# Altium PCB DOCK_ESP32_v1.0.PcbDoc
Units mil, origin at the board's own origin, x right, y up, seen from the top; angles counter-clockwise.
Board outline 2755.91 x 2755.91 mil, 4 copper layers (Top Layer, GROUND, POWER, Bottom Layer), stack 62.449 mil thick; 84 components, 47 nets, 289 pads, 150 vias.
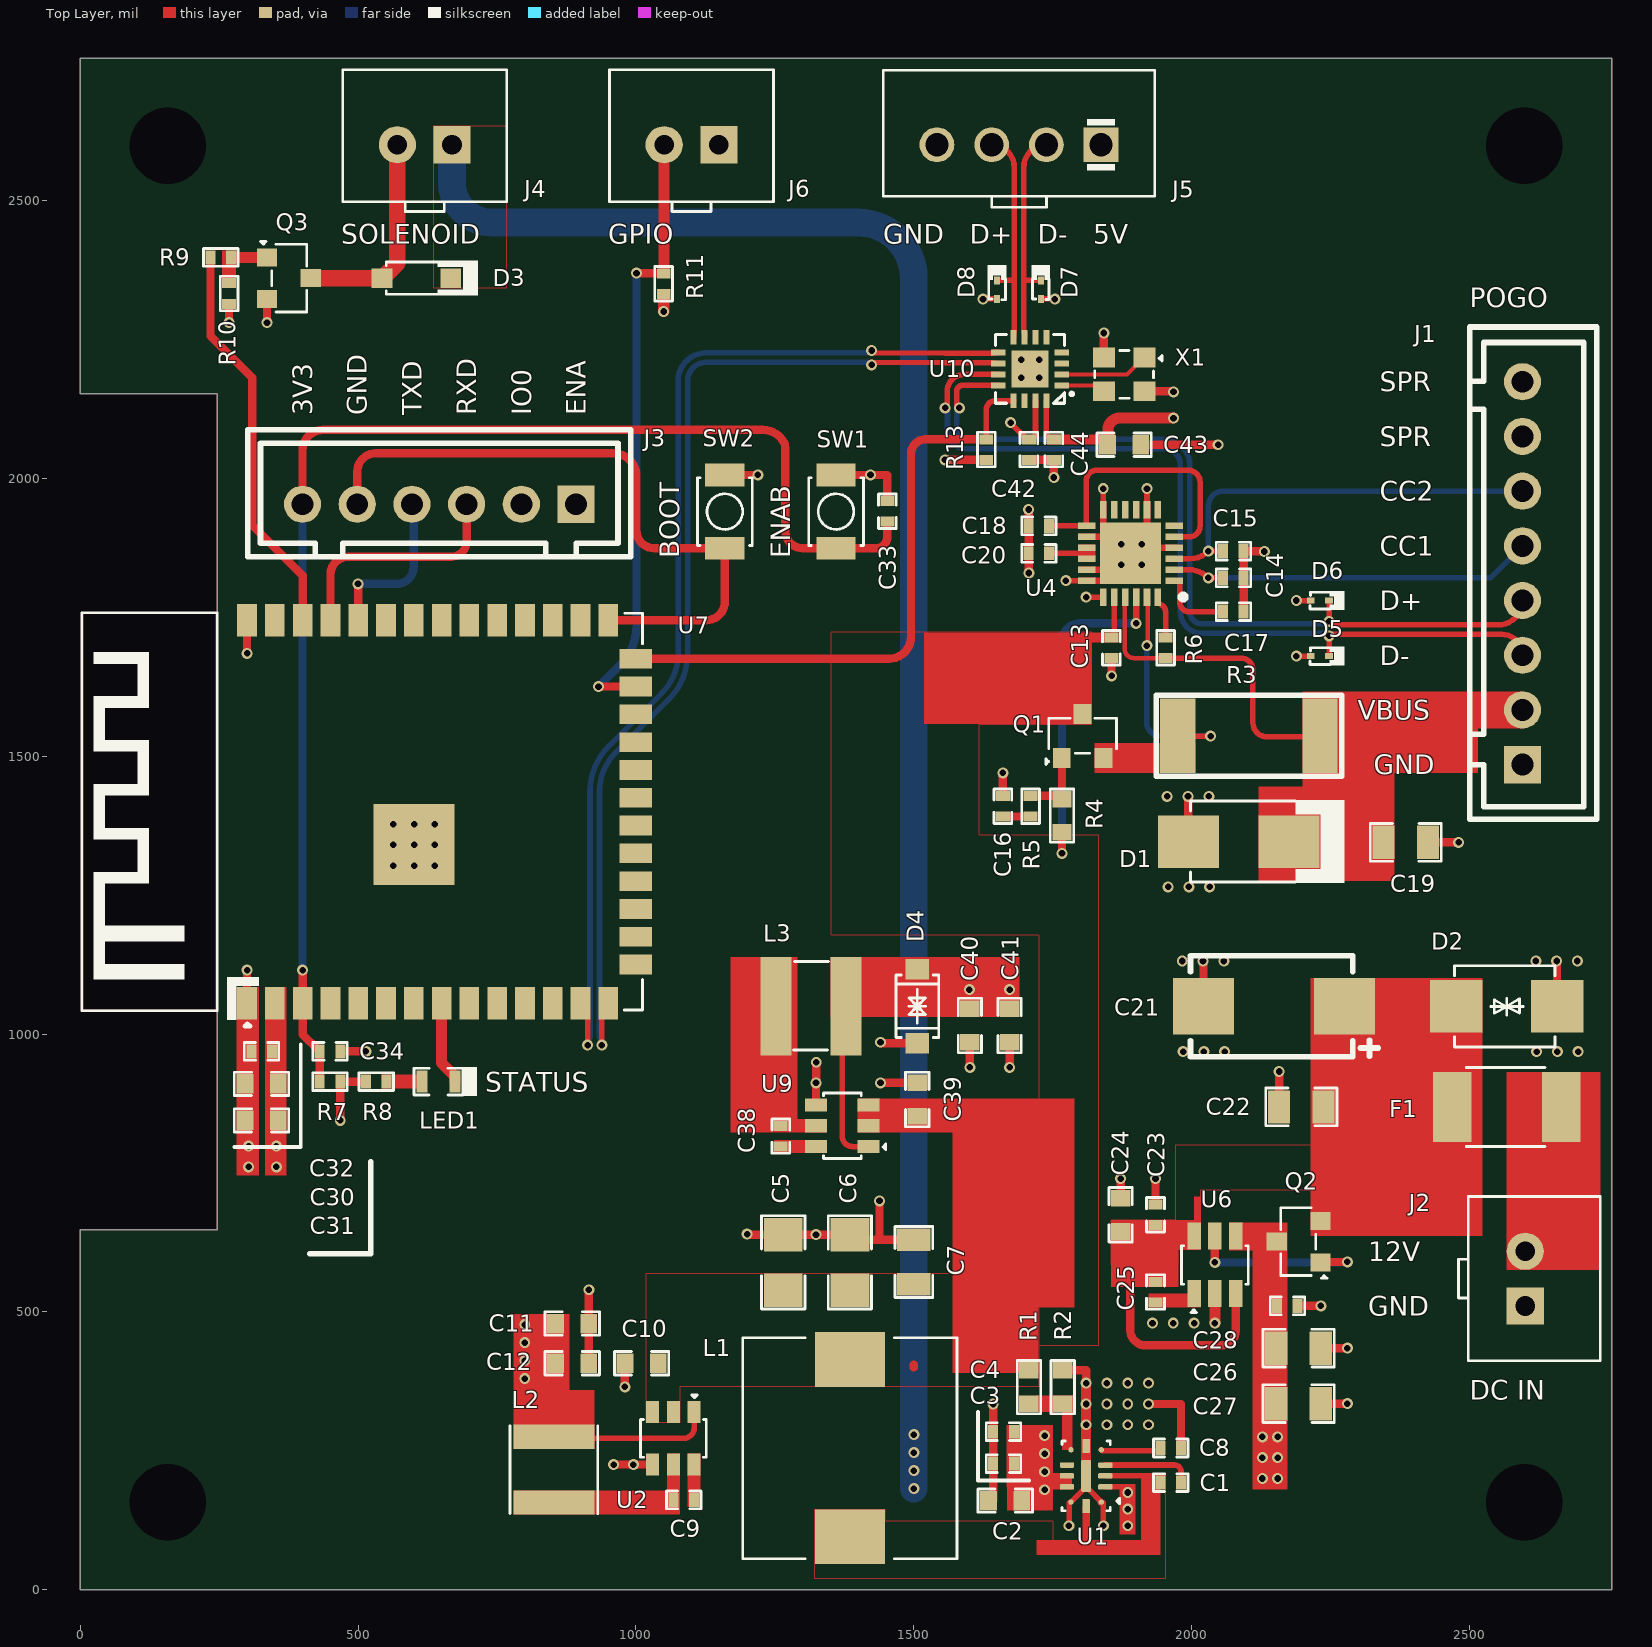
[diagram p0: Top Layer view]
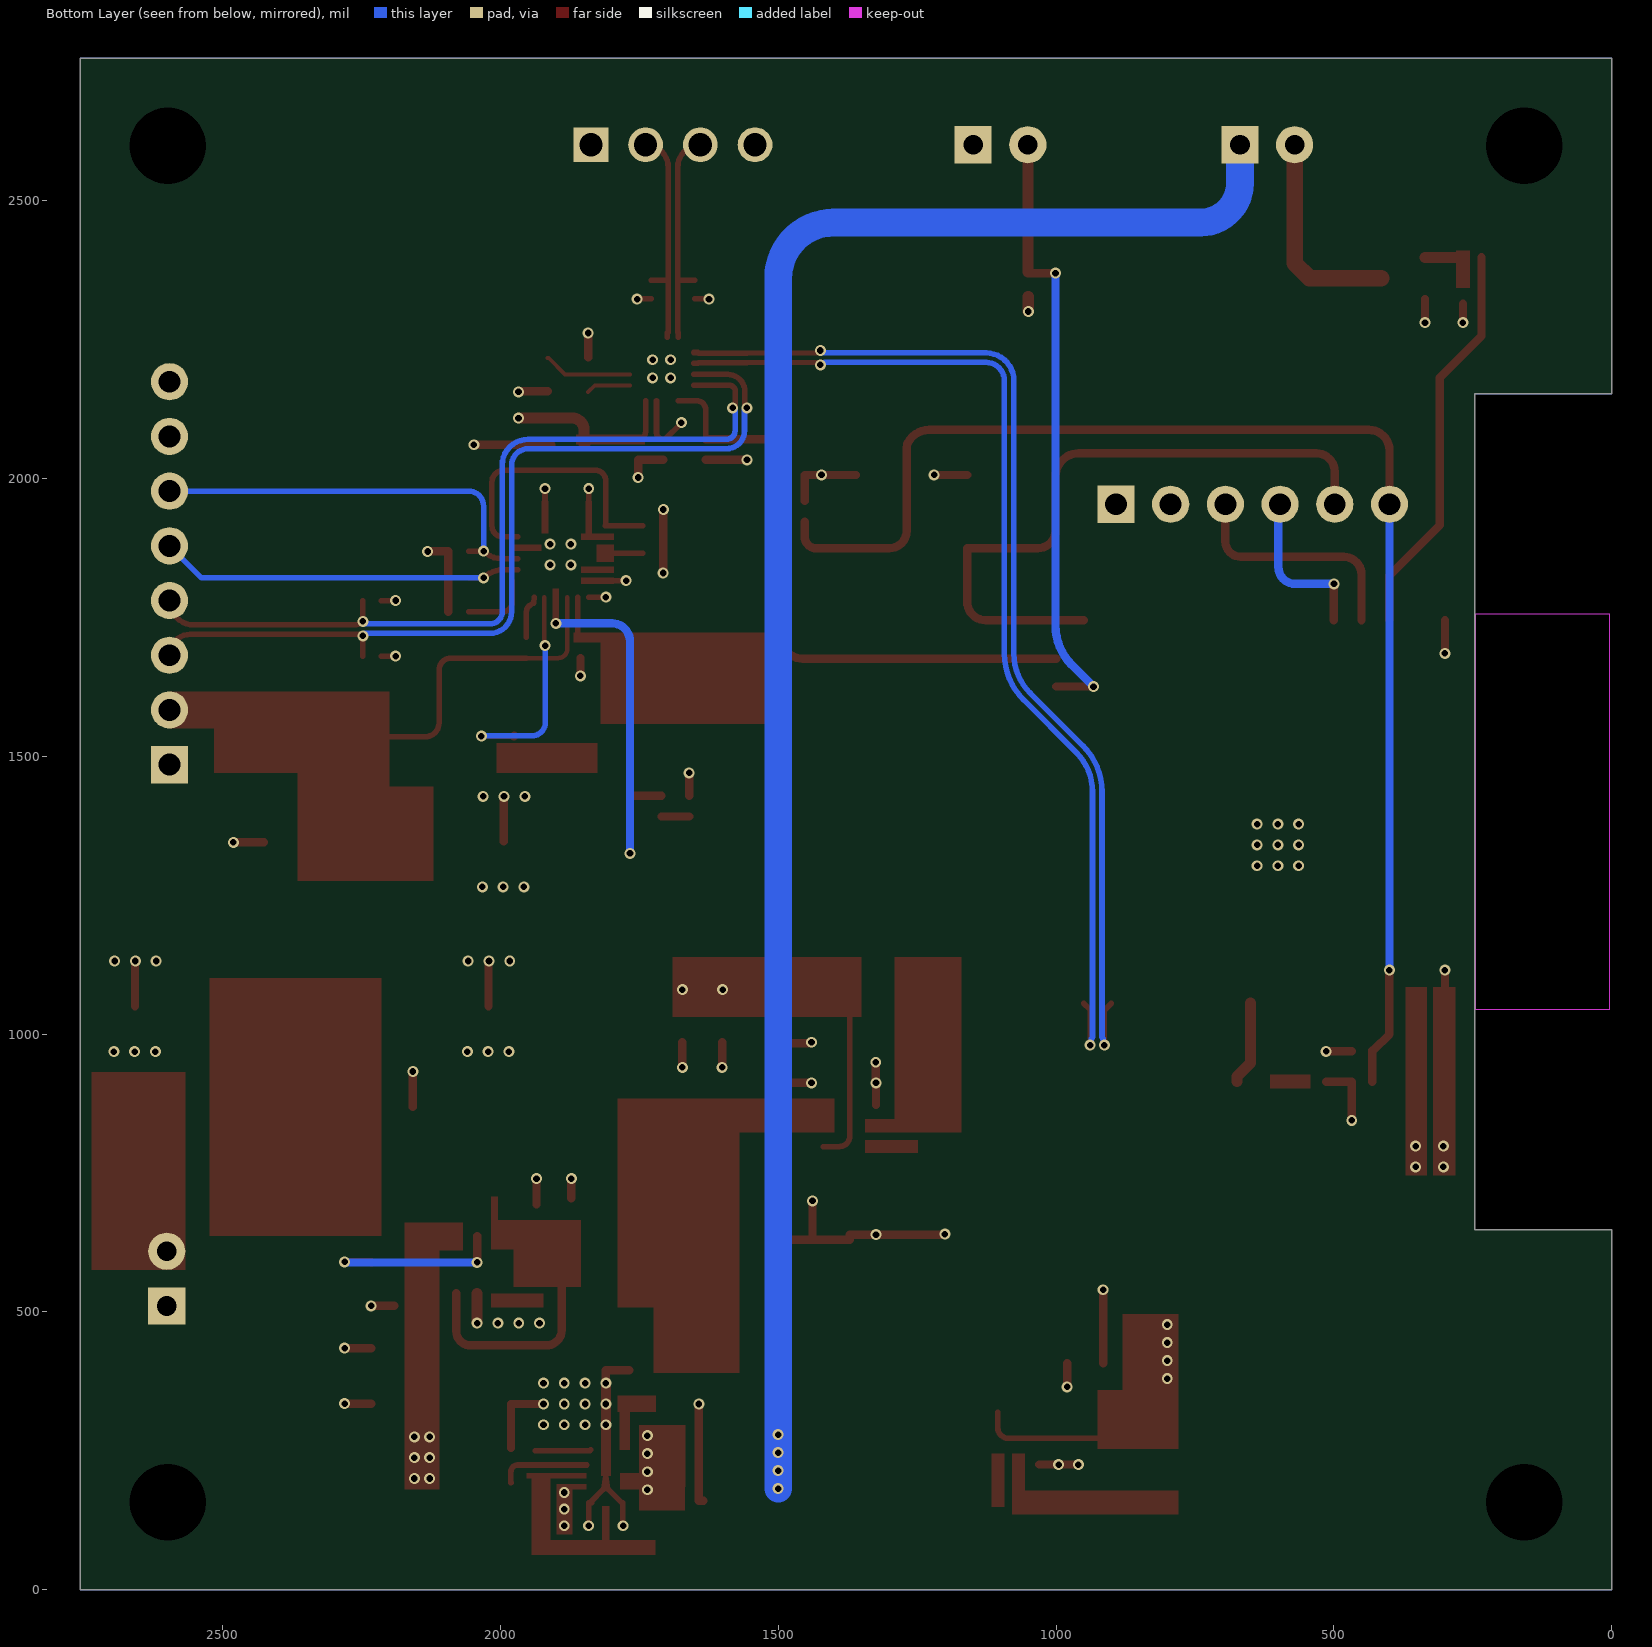
[diagram p1: Bottom Layer view, seen from below]
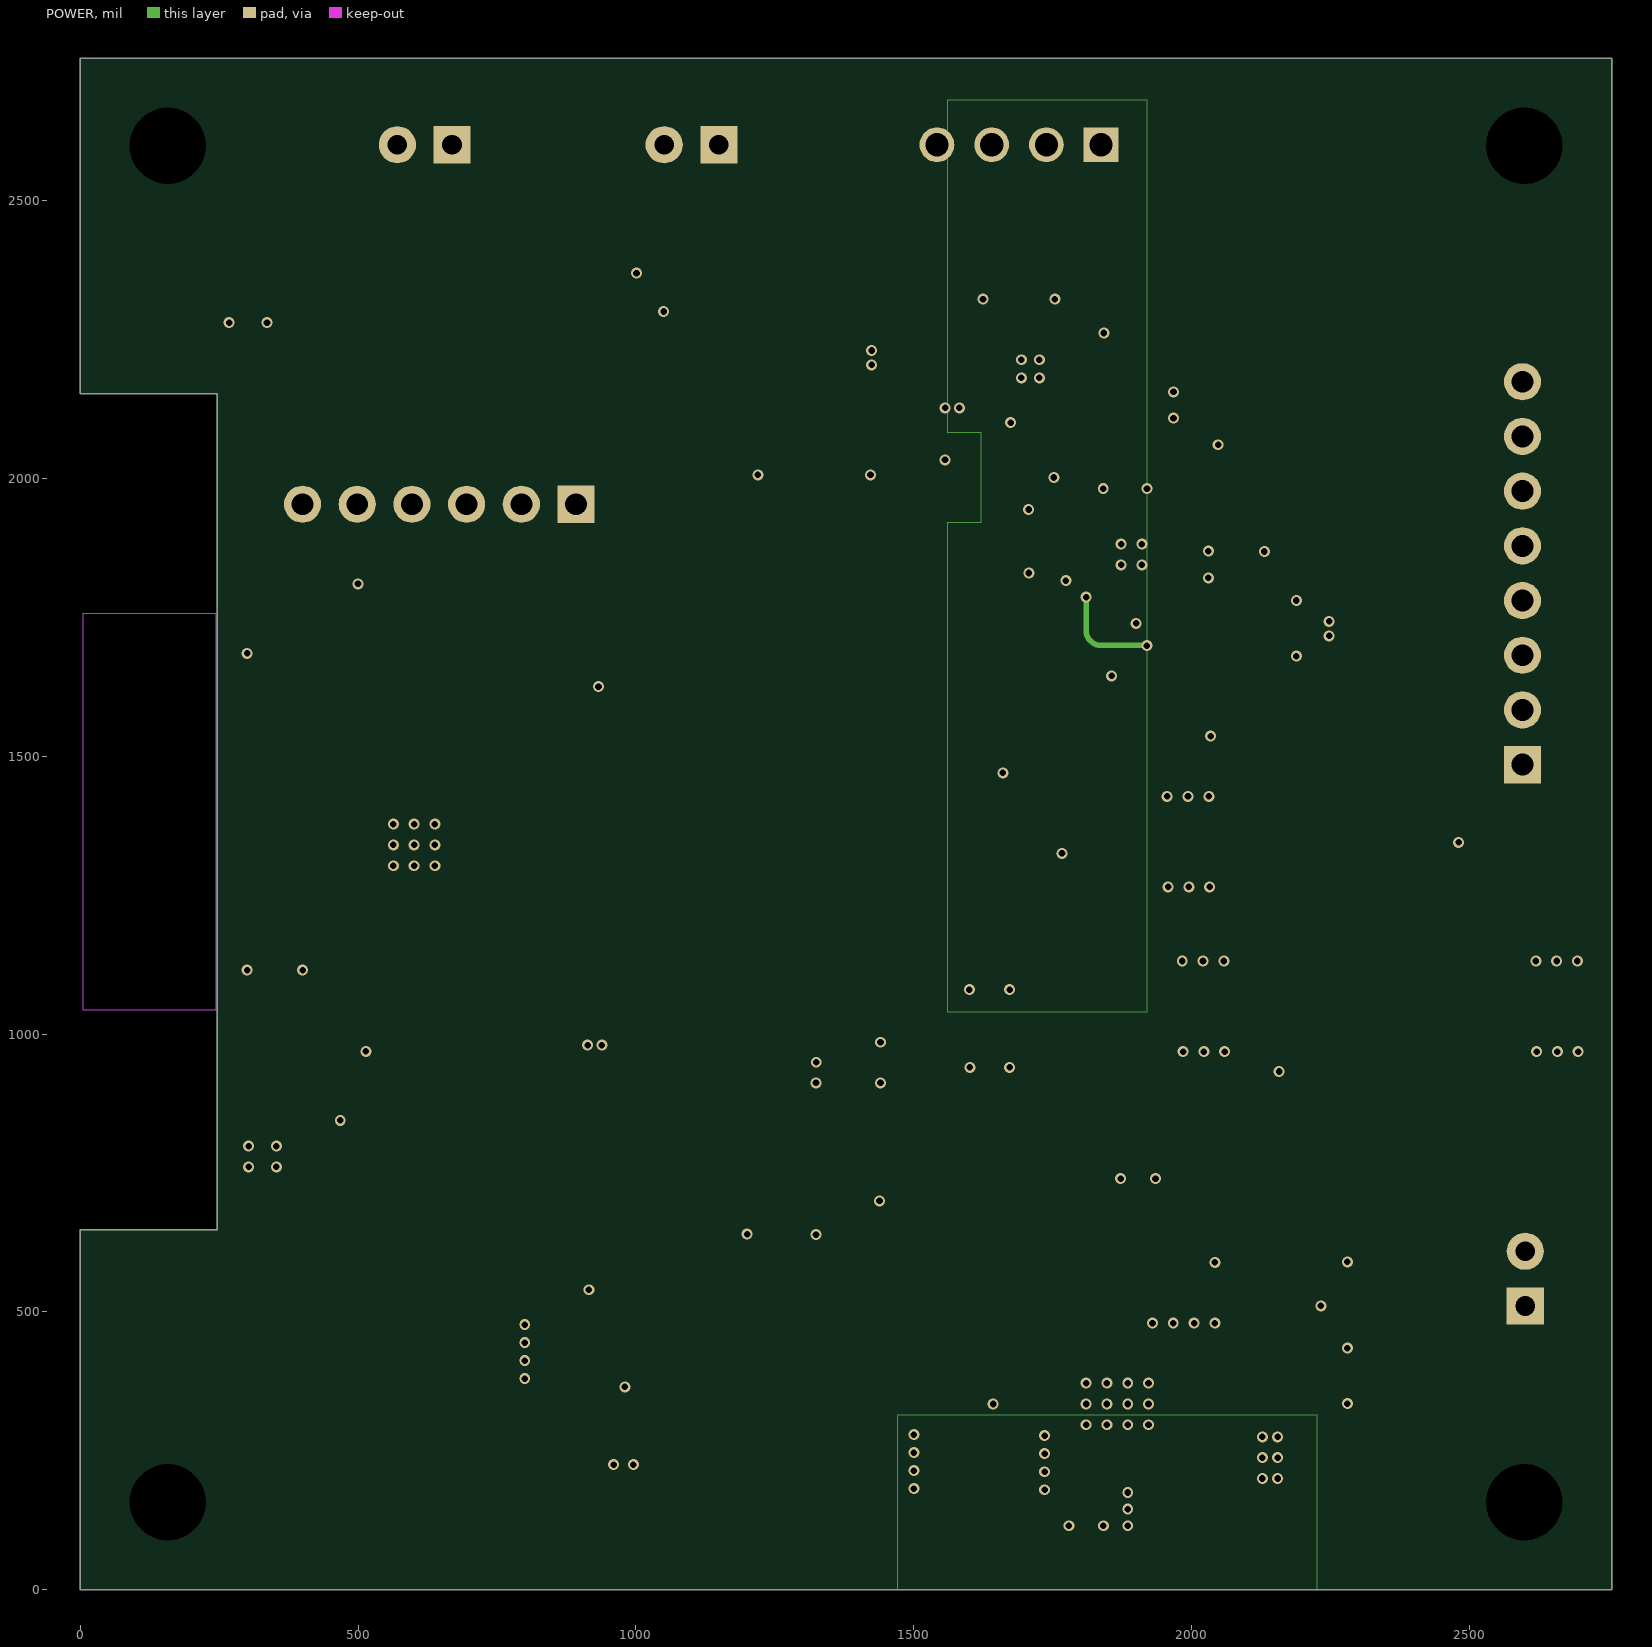
[diagram p2: POWER]

## Layer stack, top to bottom
Top Solder: solder mask 0.394, SM-001, Dk 4.8
Top Layer: signal copper 1.378
Dielectric 2: prepreg 8.284, PP-006, Dk 4.1
GROUND: signal copper 0.598
Dielectric 1: dielectric 41.929, FR-4, Dk 4.8
POWER: signal copper 0.598
Dielectric 3: prepreg 8.284, PP-006, Dk 4.1
Bottom Layer: signal copper 1.378
Bottom Solder: solder mask 0.394, SM-001, Dk 4.8

## Board outline
0,2151.61 0,2755.91 2755.91,2755.91 2755.91,0 0,0 0,648 246.69,648 246.69,2151.61

## Design rules (kind name [scope] priority, off if disabled: settings)
AssemblyTestPointUsage [All] p0: scope1count=1 scope1_0_kind=Board scope1_0_value=Board scope2count=1 scope2_0_kind=Board scope2_0_value=Board commentlength=0
AssemblyTestpoint [All] p0: scope1count=1 scope1_0_kind=Board scope1_0_value=Board scope2count=1 scope2_0_kind=Board scope2_0_value=Board commentlength=0
BoardOutlineClearance [All] p0: scope1count=1 scope1_0_kind=Board scope1_0_value=Board scope2count=1 scope2_0_kind=Board scope2_0_value=Board commentlength=0 gap=0
BoardOutlineClearance [All] p1: gap=0 ignorepadtopadclearanceinfootprint=FALSE except(10: Poly-CavityEdge Poly-CutoutEdge Poly-SplitBarrior Poly-SplitContinuation; 20: Poly-OutlineEdge)
Clearance [All] p0: scope1count=1 scope1_0_kind=Board scope1_0_value=Board scope2count=1 scope2_0_kind=Board scope2_0_value=Board commentlength=0 gap=10
Clearance [All] p1: gap=10 ignorepadtopadclearanceinfootprint=FALSE except(4: Arc-SMDPad Track-SMDPad SMDPad-SMDPad SMDPad-Fill; 5: Via-Via; 6: Arc-Arc Arc-Track Arc-Via Track-Track Track-Via; 7: Arc-Fill Track-Fill Track-Region Track-Text SMDPad-Via SMDPad-Region THPad-THPad Fill-Fill Fill-Region Poly-Region Region-Region; 15: Arc-Poly Track-Poly SMDPad-Poly THPad-Poly Via-Poly Fill-Poly; 20: Poly-Poly)
ComponentClearance [All] p0: scope1count=1 scope1_0_kind=Board scope1_0_value=Board scope2count=1 scope2_0_kind=Board scope2_0_value=Board commentlength=0 gap=0 collisioncheckmode=3
ComponentClearance [All] p1: gap=0 collisioncheckmode=3 verticalgap=0 showdistances=FALSE
DiffPairsRouting DIFF_USB [All] p0 off: scope1count=1 scope1_0_kind=Board scope1_0_value=Board scope2count=1 scope2_0_kind=Board scope2_0_value=Board commentlength=69 // Protel DXP Scope 1 Expression Was: InDifferentialPairClass('USB')
DiffPairsRouting DIFF_USB [InDifferentialPairClass('USB')] p1: maxlimit=7 minlimit=5 mostfreqgap=7 toplayer_mingap=7 toplayer_minwidth=10 toplayer_maxwidth=10 toplayer_prefwidth=10 midlayer1_maxgap=5 midlayer1_prefgap=5 midlayer1_minwidth=6.27 midlayer1_maxwidth=6.27 midlayer1_prefwidth=6.27 midlayer2_maxgap=5 midlayer2_prefgap=5 midlayer2_minwidth=6.27 midlayer2_maxwidth=6.27 midlayer2_prefwidth=6.27 bottomlayer_mingap=7 bottomlayer_minwidth=10 bottomlayer_maxwidth=10 bottomlayer_prefwidth=10 impedanceprofiledriven=TRUE impedanceprofileid={84693100-0AE8-4940-8167-FFA57031DF21} impedanceprofilevalue=90.000000 maxuncoupledlength=1000
FabricationTestPointUsage [All] p0: scope1count=1 scope1_0_kind=Board scope1_0_value=Board scope2count=1 scope2_0_kind=Board scope2_0_value=Board commentlength=0 valid=0 allowmultiple=FALSE
FabricationTestpoint [All] p0: scope1count=1 scope1_0_kind=Board scope1_0_value=Board scope2count=1 scope2_0_kind=Board scope2_0_value=Board commentlength=0 side=3 testpointundercomponent=TRUE minsize=40 maxsize=100 preferedsize=60 minholesize=0 maxholesize=40 preferedholesize=32 testpointgrid=1
FanoutControl Fanout_BGA [All] p0 off: scope1count=1 scope1_0_kind=Board scope1_0_value=Board scope2count=1 scope2_0_kind=Board scope2_0_value=Board commentlength=69 // Protel DXP Scope 1 Expression Was: IsBGA   Fanout_BGA (Default Rule)
FanoutControl Fanout_LCC [All] p0 off: scope1count=1 scope1_0_kind=Board scope1_0_value=Board scope2count=1 scope2_0_kind=Board scope2_0_value=Board commentlength=69 // Protel DXP Scope 1 Expression Was: IsLCC   Fanout_LCC (Default Rule)
FanoutControl Fanout_SOIC [All] p0 off: scope1count=1 scope1_0_kind=Board scope1_0_value=Board scope2count=1 scope2_0_kind=Board scope2_0_value=Board commentlength=71 // Protel DXP Scope 1 Expression Was: IsSOIC   Fanout_SOIC (Default Rule)
FanoutControl Fanout_Small [All] p0 off: scope1count=1 scope1_0_kind=Board scope1_0_value=Board scope2count=1 scope2_0_kind=Board scope2_0_value=Board commentlength=84 // Protel DXP Scope 1 Expression Was: (CompPinCount < 5)   Fanout_Small (Default Rule)
FanoutControl Fanout_Default [All] p0: scope1count=1 scope1_0_kind=Board scope1_0_value=Board scope2count=1 scope2_0_kind=Board scope2_0_value=Board commentlength=30 // Fanout_Default (Default Rule)
Height [All] p0: scope1count=1 scope1_0_kind=Board scope1_0_value=Board scope2count=1 scope2_0_kind=Board scope2_0_value=Board commentlength=0
Height [All] p1: minheight=0 maxheight=2000 prefheight=500
HoleSize [All] p0: scope1count=1 scope1_0_kind=Board scope1_0_value=Board scope2count=1 scope2_0_kind=Board scope2_0_value=Board commentlength=0 absolutevalues=TRUE maxlimit=137.8 minlimit=1 maxpercent=80.000 minpercent=20.000
HoleSize [All] p1: absolutevalues=TRUE maxlimit=137.8 minlimit=1 maxpercent=80.000 minpercent=20.000
HoleToHoleClearance [All] p0: scope1count=1 scope1_0_kind=Board scope1_0_value=Board scope2count=1 scope2_0_kind=Board scope2_0_value=Board commentlength=0
LayerPairs [All] p0: scope1count=1 scope1_0_kind=Board scope1_0_value=Board scope2count=1 scope2_0_kind=Board scope2_0_value=Board commentlength=0 enforce=TRUE
MinimumSolderMaskSliver [All] p0: scope1count=1 scope1_0_kind=Board scope1_0_value=Board scope2count=1 scope2_0_kind=Board scope2_0_value=Board commentlength=0
MinimumSolderMaskSliver [All] p1: minsoldermaskwidth=0
NetAntennae [All] p0: scope1count=1 scope1_0_kind=Board scope1_0_value=Board scope2count=1 scope2_0_kind=Board scope2_0_value=Board commentlength=0
PasteMaskExpansion [All] p0: scope1count=1 scope1_0_kind=Board scope1_0_value=Board scope2count=1 scope2_0_kind=Board scope2_0_value=Board commentlength=0 expansion=0
PlaneClearance [All] p0: scope1count=1 scope1_0_kind=Board scope1_0_value=Board scope2count=1 scope2_0_kind=Board scope2_0_value=Board commentlength=0 clearance=20
PlaneConnect [All] p0: scope1count=1 scope1_0_kind=Board scope1_0_value=Board scope2count=1 scope2_0_kind=Board scope2_0_value=Board commentlength=0 planeconnectstyle=Relief reliefexpansion=20 reliefentries=4 reliefconductorwidth=10 reliefairgap=10
PolygonConnect [All] p0: scope1count=1 scope1_0_kind=Board scope1_0_value=Board scope2count=1 scope2_0_kind=Board scope2_0_value=Board commentlength=0 connectstyle=Direct reliefconductorwidth=10 reliefentries=4 polygonreliefangle="90 Angle"
PolygonConnect [All] p1: connectstyle=Direct reliefconductorwidth=10 reliefentries=4 polygonreliefangle="90 Angle" airgapwidth=10
RoutingCorners [All] p0: scope1count=1 scope1_0_kind=Board scope1_0_value=Board scope2count=1 scope2_0_kind=Board scope2_0_value=Board commentlength=0 cornerstyle=45-Degree minsetback=100 maxsetback=100
RoutingLayers [All] p0: scope1count=1 scope1_0_kind=Board scope1_0_value=Board scope2count=1 scope2_0_kind=Board scope2_0_value=Board commentlength=0 top layer=Automatic mid layer 1="Not Used" mid layer 2="Not Used" bottom layer=Automatic
RoutingPriority [All] p0: scope1count=1 scope1_0_kind=Board scope1_0_value=Board scope2count=1 scope2_0_kind=Board scope2_0_value=Board commentlength=0
RoutingTopology [All] p0: scope1count=1 scope1_0_kind=Board scope1_0_value=Board scope2count=1 scope2_0_kind=Board scope2_0_value=Board commentlength=0 topology=Shortest
RoutingVias [All] p0: scope1count=1 scope1_0_kind=Board scope1_0_value=Board scope2count=1 scope2_0_kind=Board scope2_0_value=Board commentlength=0 holewidth=11.81 width=19.68 viastyle="Through Hole" minholewidth=11.81 minwidth=19.68 maxholewidth=11.81 maxwidth=19.68
RoutingVias [All] p1: holewidth=11.81 width=19.68 viastyle="Through Hole" minholewidth=11.81 minwidth=19.68 maxholewidth=11.81 maxwidth=19.68
ShortCircuit [All] p0: scope1count=1 scope1_0_kind=Board scope1_0_value=Board scope2count=1 scope2_0_kind=Board scope2_0_value=Board commentlength=0 allowed=FALSE
SilkToBoardRegionClearance [All] p0: scope1count=1 scope1_0_kind=Board scope1_0_value=Board scope2count=1 scope2_0_kind=Board scope2_0_value=Board commentlength=0
SilkToSilkClearance [All] p0: scope1count=1 scope1_0_kind=Board scope1_0_value=Board scope2count=1 scope2_0_kind=Board scope2_0_value=Board commentlength=0
SilkToSilkClearance [All] p1: silktosilkclearance=0
SilkToSolderMaskClearance [All] p0 off: scope1count=1 scope1_0_kind=Board scope1_0_value=Board scope2count=1 scope2_0_kind=Board scope2_0_value=Board commentlength=44 // Protel DXP Scope 1 Expression Was: IsPad
SilkToSolderMaskClearance [IsPad] p1: minsilkscreentomaskgap=0 clearancetoexposedcopper=TRUE
SolderMaskExpansion [All] p0: scope1count=1 scope1_0_kind=Board scope1_0_value=Board scope2count=1 scope2_0_kind=Board scope2_0_value=Board commentlength=0 expansion=4
SolderMaskExpansion [All] p1: expansion=4 istentingtop=FALSE
SupplyNets "Schematic Supply Nets_8" [All] p0: scope1count=1 scope1_0_kind=Net scope1_0_value=VCC_DCIN scope2count=1 scope2_0_kind=Board scope2_0_value=Board commentlength=0 voltage=0.000
SupplyNets "Schematic Supply Nets_7" [All] p0: scope1count=1 scope1_0_kind=Net scope1_0_value=VCC_12V scope2count=1 scope2_0_kind=Board scope2_0_value=Board commentlength=0 voltage=0.000
SupplyNets "Schematic Supply Nets_6" [All] p0: scope1count=1 scope1_0_kind=Net scope1_0_value=5V0 scope2count=1 scope2_0_kind=Board scope2_0_value=Board commentlength=0 voltage=0.000
SupplyNets "Schematic Supply Nets_5" [All] p0: scope1count=1 scope1_0_kind=Net scope1_0_value=VCC_9V scope2count=1 scope2_0_kind=Board scope2_0_value=Board commentlength=0 voltage=0.000
SupplyNets "Schematic Supply Nets_4" [All] p0: scope1count=1 scope1_0_kind=Net scope1_0_value=VBUS scope2count=1 scope2_0_kind=Board scope2_0_value=Board commentlength=0 voltage=0.000
SupplyNets "Schematic Supply Nets_13" [All] p0: scope1count=1 scope1_0_kind=Net scope1_0_value=3V3 scope2count=1 scope2_0_kind=Board scope2_0_value=Board commentlength=0 voltage=0.000
SupplyNets "Schematic Supply Nets_17" [All] p0: scope1count=1 scope1_0_kind=Net scope1_0_value=GND scope2count=1 scope2_0_kind=Board scope2_0_value=Board commentlength=0 voltage=0.000
SupplyNets "Schematic Supply Nets_8" [InNet('VCC_DCIN')] p1: voltage=0.000
SupplyNets "Schematic Supply Nets_7" [InNet('VCC_12V')] p2: voltage=0.000
SupplyNets "Schematic Supply Nets_6" [InNet('5V0')] p3: voltage=0.000
SupplyNets "Schematic Supply Nets_5" [InNet('VCC_9V')] p4: voltage=0.000
SupplyNets "Schematic Supply Nets_4" [InNet('VBUS')] p5: voltage=0.000
SupplyNets "Schematic Supply Nets_13" [InNet('3V3')] p6: voltage=0.000
SupplyNets "Schematic Supply Nets_17" [InNet('GND')] p7: voltage=0.000
UnRoutedNet [All] p0: scope1count=1 scope1_0_kind=Board scope1_0_value=Board scope2count=1 scope2_0_kind=Board scope2_0_value=Board commentlength=0
UnpouredPolygon [All] p0: scope1count=1 scope1_0_kind=Board scope1_0_value=Board scope2count=1 scope2_0_kind=Board scope2_0_value=Board commentlength=0
Width RF [All] p0: scope1count=1 scope1_0_kind=NetClass scope1_0_value=RF scope2count=1 scope2_0_kind=Board scope2_0_value=Board commentlength=0 maxlimit=15 minlimit=11.03 preferedwidth=15
Width [All] p0: scope1count=1 scope1_0_kind=Board scope1_0_value=Board scope2count=1 scope2_0_kind=Board scope2_0_value=Board commentlength=0 maxlimit=50 minlimit=4 preferedwidth=8
Width RF [InNetClass('RF')] p1: maxlimit=15 minlimit=11.03 preferedwidth=15 toplayer_minwidth=15 midlayer1_maxwidth=11.03 midlayer1_prefwidth=11.03 midlayer2_maxwidth=11.03 midlayer2_prefwidth=11.03 bottomlayer_minwidth=15 impedanceprofiledriven=TRUE impedanceprofileid={48E25E69-08EC-44ED-BDA2-6F1AC4B2B37A} impedanceprofilevalue=50.000000 minimp=50.000000 maximp=50.000000 favimp=50.000000
Width [All] p2: maxlimit=50 minlimit=4 preferedwidth=8 minimp=50.000000 maximp=50.000000 favimp=50.000000
23 further rules are at their usual default settings.

## Classes and differential pairs
component class USBC_PD_SOURCING: C13 C14 C15 C16 C17 C18 C19 C20 C21 C22 C23 C24 C25 C26 C27 C28 D1 D2 D5 D6 F1 J1 J2 Q1 Q2 R3 R4 R5 R6 U4 U6
component class ESP32_CONTROLLER_SHEET: C30 C31 C32 C33 C34 C42 C43 C44 D3 D7 D8 J3 J4 J5 J6 LED1 Q3 R7 R8 R9 R10 R11 R13 SW1 SW2 U7 U10 X1
component class POWER_BUCK_SHEET: C1 C2 C3 C4 C5 C6 C7 C8 C9 C10 C11 C12 C38 C39 C40 C41 D4 L1 L2 L3 R1 R2 U1 U2 U9
differential pair USB2: +USB2_P -USB2_N
differential pair USB1: +USB1_P -USB1_N
differential pair " ": +TYPEC_P -TYPEC_N

## Components (designator, comment, footprint, x,y, rotation, side; value= is the part's Value field where it differs from the comment)
C1 "0.1uF" Cap-0402 1962.11,193.01 r0 top
C2 "4.7UF" Cap-0603 1664.26,160.69 r0 top
C3 "220nF" Cap-0402 1661.26,227.35 r0 top
C4 "220nF" Cap-0402 1661.26,284.62 r0 top
C5 "47uF" Cap-1206 1265,589.27 r90 top
C6 "47uF" Cap-1206 1385,589.26 r90 top
C7 "22uF" Cap-0805 1500,590 r270 top
C8 "1uF" Cap-0402 1962.11,255.36 r180 top
C9 "0.1uF" Cap-0402 1086,162.09 r0 top
C10 "10uF" Cap-0603 1010.26,407.7 r180 top
C11 "22uF" Cap-0603 885.41,479.24 r180 top
C12 "22uF" Cap-0603 885.4,407.7 r180 top
C13 "0.1uF" Cap-0402 1855.47,1695 r90 top
C14 "560pF" Cap-0402 2074.99,1820.67 r180 top
C15 "560pF" Cap-0402 2075,1868.88 r180 top
C16 "10nF" Cap-0402 1660.1,1410 r270 top
C17 "0.1uF" Cap-0402 2075,1760 r0 top
C18 "220nF" Cap-0402 1725,1914.21 r180 top
C19 "10uF" Cap-0805 2385,1345 r180 top
C20 "0.1uF" Cap-0402 1724.99,1865 r0 top
C21 "100uF" Case-E 2274.55,1050 r180 top
C22 "10uF" Cap-0805 2197.2,868.9 r0 top
C23 "0.1uF" Cap-0402 1934.81,674.86 r90 top
C24 "4.7uF" Cap-0603 1871.99,674.86 r270 top
C25 "1uF" Cap-0402 1934.81,535.85 r90 top
C26 "4.7uF" Cap-0805 2192.18,435 r180 top
C27 "4.7uF" Cap-0805 2192.18,335 r180 top
C28 "0.1uF" Cap-0402 2172.18,510.99 r0 top
C30 "22uF" Cap-0603 326.53,910.49 r0 top
C31 "10uF" Cap-0603 326.53,844.59 r180 top
C32 "0.1uF" Cap-0402 326.53,968.9 r180 top
C33 "0.1uF" Cap-0402 1452.38,1940.51 r90 top
C34 "1uF" Cap-0402 449.61,968.89 r180 top
C38 "0.1uF" Cap-0402 1260.61,816.4 r270 top
C39 "10uF" Cap-0603 1506.22,882.15 r90 top
C40 "22uF" Cap-0603 1600.74,1015.29 r90 top
C41 "22uF" Cap-0603 1672.27,1015.29 r90 top
C42 "4.7uF" Cap-0402 1706.97,2051.59 r90 top
C43 "10uF" Cap-0603 1878.31,2060.3 r0 top
C44 "0.1uF" Cap-0402 1751.85,2051.6 r270 top
D1 "SMBJ12A" SMB_ 2084.55,1346.37 r0 top
D2 "SMBJ33CA-13-F" "SMB Bi Directional" 2566.61,1050 r180 top
D3 "1N4148W" SOD-123 605,2360 r0 top
D4 "SMF5.0CA" "SOD-123 (Bi-Directional)" 1506.22,1050 r270 top
D5 "ESD9L5.0ST5G" SOD-923. 2230.55,1680 r180 top
D6 "ESD9L5.0ST5G" SOD-923. 2230.55,1780 r180 top
D7 "ESD9L5.0ST5G" SOD-923. 1728.42,2339.34 r270 top
D8 "ESD9L5.0ST5G" SOD-923. 1649.68,2339.33 r270 top
F1 "BSMD1812-300-24V" Fuse-1812_ 2566.71,868.9 r180 top
J1 "2.54-8P ZZDK" "2.54-8P ZZDK" 2595,1780 r90 top
J2 "2.54-2P ZZDK" "2.54-2P ZZDK" 2600,560 r90 top
J3 "2.54-6P ZZDK" "2.54-6P ZZDK" 596.98,1953.25 r180 top
J4 "2.54-2P ZZDK" "2.54-2P ZZDK" 620,2600 r180 top
J5 "B4B-XH-A(LF)(SN)" B4B-XH-A(LF)(SN). 1836.85,2600 r180 top
J6 "2.54-2P ZZDK" "2.54-2P ZZDK" 1100,2600 r180 top
L1 "4.7uH" YSLF1045-4R7M 1385,255 r90 top
L2 "3.9uH" FNR4030S3R9MT 852.4,216.44 r90 top
L3 "4.7uH" SMNR4030-4R7MT 1314.96,1050 r0 top
LED1 "Emerald" LED-0603 644.94,914.38 r0 top
Q1 "AO3400A" sot-23 1803.55,1536.22 r0 top
Q2 "AO3400A" sot-23 2192.18,626.57 r90 top
Q3 "AO3400A" sot-23 375.63,2360 r270 top
R1 "100K" Res-0603 1707.14,364.9 r90 top
R2 "12.4K" Res-0603 1767.87,364.9 r270 top
R3 "5mR" RES-2512 2102.76,1536.96 r0 top
R4 "10R" Res-0603 1766.6,1393 r90 top
R5 "1K" Res-0402 1710,1410 r90 top
R6 "220R" Res-0402 1952.99,1695 r270 top
R7 "10K" Res-0402 449.6,914.38 r0 top
R8 "470R" Res-0402 532.68,914.38 r180 top
R9 "220R" Res-0402 253.03,2397.3 r0 top
R10 "10K" Res-0402 268.03,2332.35 r90 top
R11 "10K" Res-0402 1050,2350 r270 top
R13 "10K" Res-0402 1630.32,2051.59 r270 top
SW1 "GT-TC032A-H015-L1" GT-TC032A-H015-L1 1360,1940 r270 top
SW2 "GT-TC032A-H015-L1" GT-TC032A-H015-L1 1160,1940 r270 top
U1 "LM60440DRPKR" "13-WQFN-HR (3x2)" 1810,205 r180 top
U2 "AP63203WU-7" TSOT-23-6 1067.4,272.76 r270 top
U4 "TPS25740ARGER" QFN50P400X400X100-25N-D 1890,1865 r180 top
U6 "LM74700QDBVRQ1" SOT-23-6 2041.54,585 r90 top
U7 "ESP32-S3-WROOM-1-N8" "41-SMD Module" 650,1400 r90 top
U9 "AP63205WU-7" TSOT-23-6 1371.28,835 r180 top
U10 "CH334P" QFN-16 1709.06,2196.7 r180 top
X1 "12MHz" SMD2520-4P 1878.31,2186.76 r180 top

## Footprints (in the part's own frame and the unit in brackets; to place one, negate y for a bottom-side part, rotate by r counter-clockwise, add the part's x,y. Pads: shape width x height; smd on the part's side, far side on the other; paste and mask are expansions set on the pad)
"2.54-2P ZZDK" [mm]
  rect 1.7x1.7 hole 0.9 paste+0 mask+0: 1(-1.25,0)
  round 1.7 hole 0.9 paste+0 mask+0: 2(1.25,0)
  silkscreen extent -3.75,-3.43 3.75,3.05
"2.54-6P ZZDK" [mm]
  rect 1.7x1.7 hole 1: 1(-7.5,0)
  round 1.7 hole 1: 2(-5,0) 3(-2.5,0) 4(0,0) 5(2.5,0) 6(5,0)
  silkscreen extent -10,-3.4 7.5,2.4
"2.54-8P ZZDK" [mm]
  rect 1.7x1.7 hole 1: 1(-7.5,0)
  round 1.7 hole 1: 2(-5,0) 3(-2.5,0) 4(0,0) 5(2.5,0) 6(5,0) 7(7.5,0) 8(10,0)
  silkscreen extent -10,-3.4 12.5,2.4
"13-WQFN-HR (3x2)" [mm]
  round 0.244 smd: 1(-0.694,1.194) 5(-0.694,-1.194) 7(0.694,-1.194) 11(0.694,1.194)
  rrect40% 0.65x0.25 smd: 2(-0.875,0.5) 3(-0.875,0) 4(-0.875,-0.5) 8(0.875,-0.5) 9(0.875,0) 10(0.875,0.5)
  rrect29% 0.35x0.65 smd: 6(0,-1.375) 12(0,1.375)
  rrect22% 0.45x1.45 smd: 13(0,0)
  silkscreen extent -1.52,-1.59 1.1,1.59
"41-SMD Module" [mm]
  rect 1.5x0.9 smd: 1(-8.75,8.88) 2(-8.75,7.61) 3(-8.75,6.34) 4(-8.75,5.07) 5(-8.75,3.8) 6(-8.75,2.53) 7(-8.75,1.26) 8(-8.75,-0.01) 9(-8.75,-1.28) 10(-8.75,-2.55) 11(-8.75,-3.82) 12(-8.75,-5.09) 13(-8.75,-6.36) 14(-8.75,-7.63) 27(8.75,-7.63) 28(8.75,-6.36) 29(8.75,-5.09) 30(8.75,-3.82) 31(8.75,-2.55) 32(8.75,-1.28) 33(8.75,-0.01) 34(8.75,1.26) 35(8.75,2.53) 36(8.75,3.8) 37(8.75,5.07) 38(8.75,6.34) 39(8.75,7.61) 40(8.75,8.88)
  rect 0.9x1.5 smd: 15(-6.98,-8.88) 16(-5.71,-8.88) 17(-4.44,-8.88) 18(-3.17,-8.88) 19(-1.9,-8.88) 20(-0.63,-8.88) 21(0.64,-8.88) 22(1.91,-8.88) 23(3.18,-8.88) 24(4.45,-8.88) 25(5.72,-8.88) 26(6.99,-8.88)
  rect 3.7x3.7 smd: 41(-1.5,1.26)
  Keep-Out Layer region: -9.042,10.287 9.042,10.287 9.042,16.383 -9.042,16.383
  silkscreen extent -9.8,-9.2 9.09,16.43
B4B-XH-A(LF)(SN). [mm]
  rect 1.59x1.59 hole 1.06: 1(0,0)
  round 1.59 hole 1.06: 2(2.5,0) 3(5,0) 4(7.5,0)
  silkscreen extent -2.45,-3.4 9.95,2.35
Cap-0402 [mil]
  rect 18x25 smd mask+0: 1(-18.5,0) 2(18.5,0)
  silkscreen extent -31,-16 31,16
Cap-0603 [mil]
  rect 30x35 smd mask+0: 1(-30,0) 2(30,0)
  silkscreen extent -49,-21 49,21
Cap-0805 [mil] "SMD 0805"
  rect 40x60 smd mask+0: 1(-40,0) 2(40,0)
  silkscreen extent -64,-34 64,34
Cap-1206 [mil] "SMD 1206"
  rect 60x70 smd: 1(-50,0) 2(50,0)
  silkscreen extent -84,-39 84,39
Case-E [mm]
  rect 2.79x2.57 smd: 1(0,0) 2(6.44,0)
  silkscreen extent -1.56,-2.31 7.03,2.31
FNR4030S3R9MT [mm]
  rect 1.1x3.7 smd: 1(-1.5,0) 2(1.5,0)
  silkscreen extent -2,-2 2,2
Fuse-1812_ [mm]
  rect 1.78x3.2 smd: 1(-2.49,0) 2(2.49,0)
  silkscreen extent -1.75,-1.8 1.85,1.8
GT-TC032A-H015-L1 [mm]
  rect 1.05x1.8 smd: 1(-1.675,0) 2(1.675,0)
  silkscreen extent -1.55,-1.25 1.55,1.25
LED-0603 [mm]
  rect 0.5x1 smd: 1(-0.75,0) 2(0.75,0)
  silkscreen extent -1.12,-0.66 1.75,0.66
QFN50P400X400X100-25N-D [mm]
  rect 0.8x0.3 smd: 1(-2,1.25) 2(-2,0.75) 3(-2,0.25) 4(-2,-0.25) 5(-2,-0.75) 6(-2,-1.25) 13(2,-1.25) 14(2,-0.75) 15(2,-0.25) 16(2,0.25) 17(2,0.75) 18(2,1.25)
  rect 0.3x0.8 smd: 7(-1.25,-2) 8(-0.75,-2) 9(-0.25,-2) 10(0.25,-2) 11(0.75,-2) 12(1.25,-2) 19(1.25,2) 20(0.75,2) 21(0.25,2) 22(-0.25,2) 23(-0.75,2) 24(-1.25,2)
  rect 2.8x2.8 smd: 25(0,0)
  silkscreen extent -2.53,1.88 -2.28,2.12
QFN-16 [mm]
  rect 0.665x0.28 smd paste-100 mask+0: 1(-1.45,0.75) 2(-1.45,0.25) 3(-1.45,-0.25) 4(-1.45,-0.75) 9(1.45,-0.75) 10(1.45,-0.25) 11(1.45,0.25) 12(1.45,0.75)
  rect 0.28x0.665 smd paste-100 mask+0: 5(-0.75,-1.45) 6(-0.25,-1.45) 7(0.25,-1.45) 8(0.75,-1.45) 13(0.75,1.45) 14(0.25,1.45) 15(-0.25,1.45) 16(-0.75,1.45)
  rect 1.7x1.7 smd paste-100 mask+0: 17(0,0)
  silkscreen extent -1.98,-1.58 1.58,1.58
Res-0402 [mil]
  rect 18x25 smd mask+0: 1(-18.5,0) 2(18.5,0)
  silkscreen extent -32,-17 32,16
Res-0603 [mil]
  rect 30x35 smd: 1(-30,0) 2(30,0)
  silkscreen extent -48,-21 48,21
RES-2512 [mm]
  rect 1.6x3.4 smd: 1(-3.25,0) 2(3.25,0)
  silkscreen extent -4.24,-1.85 4.24,1.85
"SMB Bi Directional" [mm]
  rect 2.4x2.4 smd: 1(-2.3,0) 2(2.3,0)
  silkscreen extent -2.21,-1.85 2.39,1.85
SMB_ [mm]
  rect 2.8x2.4 smd: 1(-2.3,0) 2(2.3,0)
  silkscreen extent -2.21,-1.9 4.83,1.91
SMD2520-4P [mm]
  rect 1x0.9 smd: 1(-0.925,-0.775) 2(0.925,-0.775) 3(0.925,0.775) 4(-0.925,0.775)
  silkscreen extent -1.73,-1.09 1.35,1.09
SMNR4030-4R7MT [mm]
  rect 1.4x4.5 smd paste+0 mask+0: 1(-1.6,0) 2(1.6,0)
  silkscreen extent -0.8,-2 0.8,2.05
SOD-123 [mm]
  rect 0.95x0.9 smd: 1(-1.575,0) 2(1.575,0)
  silkscreen extent -1.37,-0.8 2.82,0.8
"SOD-123 (Bi-Directional)" [mm]
  rect 0.93x1.06 smd paste+0 mask+0: 1(1.685,0) 2(-1.685,0)
  silkscreen extent -1.43,-0.98 1.43,0.98
SOD-923. [mm]
  rect 0.36x0.27 smd: 1(-0.42,0) 2(0.42,0)
  silkscreen extent -1.12,-0.43 0.46,0.43
sot-23 [mm] "TRANS NPN 40V 0.6A SOT23"
  rect 0.82x0.92 smd: 1(-0.95,-1) 2(0.95,-1) 3(0,1)
  silkscreen extent -1.68,-1.3 1.55,0.81
SOT-23-6 [mm]
  rect 1.22x0.62 smd: 1(-1.31,0.95) 2(-1.31,0) 3(-1.31,-0.95) 4(1.31,-0.95) 5(1.31,0) 6(1.31,0.95)
  silkscreen extent -2.18,-1.52 0.86,1.52
TSOT-23-6 [mm]
  rect 1x0.6 smd: 1(-1.2,0.95) 2(-1.2,0) 3(-1.2,-0.95) 4(1.2,-0.95) 5(1.2,0) 6(1.2,0.95)
  silkscreen extent -1.98,-1.5 0.86,1.5
YSLF1045-4R7M [mm]
  rect 2.5x3.2 smd: 1(-4.05,0) 2(4.05,0)
  silkscreen extent -5.05,-4.9 5.05,4.9

## Part data
C1 C9 C13 C17 C20 C23 C28 C32 C33 C38 C44: library part CL05B104KB54PNC, "CAP CER 0.1UF 50V X7R 0402"
C2 C24: library part CL10A475KA8NQNC, "CAP CER 4.7UF 25V X5R 0603"
C3 C4 C18: library part CC0402KRX5R8BB224, "CAP CER 0.22UF 25V X5R 0402"
C5 C6: library part GRM31CR61E476ME44L, "CAP CER 47UF 25V X5R 1206"
C7: library part GRM21BR61E226ME44L, "CAP CER 22UF 25V X5R 0805"
C8 C34: library part CC0402KRX5R7BB105, "CAP CER 1UF 16V X5R 0402"
C10 C31 C39 C43: library part CC0603KRX5R7BB106, "CAP CER 10UF 16V X5R 0603"
C11 C12 C30 C40 C41: library part CC0603MRX5R6BB226, "CAP CER 22UF 10V X5R 0603"
C14 C15: library part CC0402JRX7R9BB561, "CAP CER 560PF 50V X7R 0402"
C16: library part CC0402KRX7R9BB103, "CAP CER 10000PF 50V X7R 0402"
C19 C22: library part GRM21BR61H106ME43L, "CAP CER 10UF 50V X5R 0805"
C21: library part TAJE107M025RNJ, "CAP TANT 100UF 20% 25V 2917"
C25: library part CC0402KRX5R8BB105, "CAP CER 1UF 25V X5R 0402"
C26 C27: library part GRM21BR61H475KE51L, "CAP CER 4.7UF 50V X5R 0805"
C42: library part CL05A475MO5NUNC, "CAP CER 4.7UF 16V X5R 0402"
D1: "TVS DIODE 12VWM 19.9VC DO214AA"
D2: "TVS DIODE 33VWM 53.3VC SMB"
D3: "100V 400mW Single 1.25V@150mA 8ns 300mA SOD-123 Switching Diode ROHS"
D4: "9.2V 6.4V 5V SOD-123FL TVS ROHS"
D6 D8: "TVS DIODE 5V 9.8V SOD923"
F1: "24V 3A 40A 6A 1812 Resettable Fuses ROHS"
J1: "1x8P 8P XH 1 2.5mm Tin 2 -25?~+85? Brass 3A Direct Insert Plugin,P=2.5mm Wire To Board Connector ROHS"
J2 J4 J6: "1x2P 2P XH 1 2.5mm Tin 2 -25?~+85? Brass 3A Direct Insert Plugin,P=2.5mm Wire To Board Connector ROHS"
J3: "CONN HEADER TH 6POS 2.5mm"
J5: "CONN HEADER VERT 4POS 2.5MM"
L1: library part YSLF1045-4R7M, "4.5A 4.7uH ±20% SMD,10.1x10.1mm Power Inductors ROHS"
L2: library part FNR4030S3R9MT, "2.3A 3.9uH ±20% 3.3A SMD,4x4mm Power Inductors ROHS"
L3: library part SMNR4030-4R7MT, "2.9A 4.7uH ±20% 2.9A SMD,4x4mm Power Inductors ROHS"
LED1: library part NCD0603G2, "Emerald 0603 Light Emitting Diodes (LED) ROHS"
Q1 Q2 Q3: "30V 5.8A 32mO@10V,5.8A 1.4W 1.4V@250uA N Channel SOT-23 MOSFETs ROHS"
R1: library part RC0603FR-07100KL, "RES 100K OHM 1% 1/10W 0603"
R2: library part RC0603FR-0712K4L, "RES SMD 12.4K OHM 1% 1/10W 0603"
R3: library part PA2512FKF7W0R005E, "RES 0.005 OHM 1% 2W 2512"
R4: library part RC0603FR-0710RL, "RES SMD 10 OHM 1% 1/10W 0603"
R5: library part CRCW04021K00FKEDHP, "RES SMD 1K OHM 1% 1/5W 0402"
R6 R9: library part RC0402FR-07220RL, "RES 220 OHM 1% 1/16W 0402"
R7 R10 R11 R13: library part RC0402FR-0710KL, "RES 10K OHM 1% 1/16W 0402"
R8: library part RC0402FR-07470RL, "RES 470 OHM 1% 1/16W 0402"
SW1 SW2: "None Without bracket 50mA 3.05mm 100000 Times 12V 160gf 2.5mm 1.5mm Round Button Standing paste SPST SMD Tactile Switches ROHS"
U1: library part LM60440AQRPKRQ1, "IC REG BUCK ADJ 4A 13WQFN"
U2: "IC REG BUCK 3.3V 2A TSOT26"
U4: "TPS25740A USB Type-C Rev 1.2 and USB PD 2.0 Source Controller (5V/9V/15V)"
U6: "OR Controller N+1 ORing Controller N-Channel 1:1 SOT-23-6"
U7: "ESP32-S3 chip 2.4GHz SMD,18x25.5mm WiFi Modules ROHS"
U9: "IC REG BUCK 5V 2A TSOT26"
U10: "480Mbps Hub USB 2.0 QFN-16(3x3) Interface Controllers RoHS"
X1: library part 2TJ412000XYGBC, "12MHz 18pF ±10ppm SMD2520-4P Crystals ROHS"

## Free pads (board coordinates)
  round 0 hole 137.8 unplated: MH(157.48,157.48) MH(157.48,2598.43) MH(2598.43,157.48) MH(2598.43,2598.43)

## Via types
v1: diameter 19.68, hole 11.81, Top Layer to Bottom Layer, tented both sides, 150 vias

## Nets (pads, with @x,y where several pads share a name; then routed paths per layer and width w, separated by ;. In a path a pad name is that pad's centre, name@x,y a point inside that pad or via, vN(x,y) a via of type N, cw(c..) or ccw(c..) an arc to the next point about the centre after c; other vN are vias at no path point)
3V3: C11.2 C12.2 C30.2 C31.1 C32.1 C43.1 C44.1 J3.1 L2.2 R7.2 R8.2 R11.2 R13.2 U2.1 U7.2 U10.16 | length 747.5
  Top Layer w10: L2.2@852.4,279.43 ccw(c859.08,279.43) 859.08,272.76 1086,272.76 ccw(c1086,291.56) 1104.8,291.56 U2.1 ; U10.16 1738.59,2083.37 ccw(c1751.85,2083.37) C44.1 ; C43.1@1847.31,2061.29 C43.1
  Top Layer w15: v1(468.1,844.59) R7.2 R8.2 ; v1(1556.12,2033.09) R13.2
  Top Layer w20: v1(1050,2300) R11.2@1050,2326.72 ; C43.1@1847.31,2061.29 ccw(c1847.31,2063.17) 1849.19,2063.17 1849.19,2086.85 cw(c1870.67,2086.85) 1870.67,2108.33 v1(1967.16,2108.33)
  other v1: 800,380 800,412.39 800,444.78 800,477.18 353.17,760.96 353.17,798.36
5V0: C40.2 C41.2 C42.2 D4.2 J5.1 L3.2 U9.1 U10.15 | length 417.3
  Top Layer w10: L3.2 ccw(c1377.96,1043.32) 1371.28,1043.32 1371.28,816.4 ccw(c1390.09,816.4) 1390.09,797.6 U9.1 ; v1(1674.02,2100) 1674.02,2099.55 1703.47,2070.09 C42.2 ccw(c1706.97,2082.02) 1718.9,2082.02 U10.15
  other v1: 1600,1080 1672.27,1080
ESP-EN: C33.1 C34.2 J3.6 R7.1 SW1.2 U7.3 | length 2445
  Top Layer w15: J3.6 400.13,2049.7 cw(c437.54,2049.7) 437.54,2087.11 1228.45,2087.11 cw(c1228.45,2044.13) 1266.68,2063.76 cw(c1253.32,2056.94) 1268.14,2059.3 1268.86,2054.76 1268.86,1905.2 ccw(c1300,1905.2) 1300,1874.05 SW1.2 1431.44,1874.05 ccw(c1431.44,1895) 1452.38,1895 C33.1 ; v1(400.39,1115) U7.3 400.39,999.61 428.61,971.39 430.11,971.39 431.11,970.39 C34.2 R7.1
  Bottom Layer w15: J3.6 400.26,1953.11 400.26,1115.13 v1(400.39,1115)
GND: C2.1 C3.1 C4.1 C5.2 C6.2 C7.1 C8.1 C10.2 C11.1 C12.1 C13.1 C14.1 C15.1 C16.1 C17.2 C18.2 C19.1 C20.1 C21.2 C22.1 C23.2 C24.1 C26.1 C27.1 C28.2 C30.1 C31.2 C32.2 C33.2 C34.1 C39.2 C40.1 C41.1 C42.1 C43.2 C44.2 D1.1 D2.1 D4.1 D5.2 D6.2 D7.2 D8.2 J1.1 J2.1 J3.2 J5.4 J6.1 Q3.2 R2.1 R10.1 SW1.1 SW2.1 U1.1 U1.6 U1.11 U1.13 U2.4 U4.4 U4.8 U4.12 U4.14 U4.17 U4.18 U4.25 U6.2 U7.1 U7.40 U7.41 U9.4 U10.17 X1.2 X1.4 | length 3451.5
  Top Layer w10: v1@1624.44,2322.8 D8.2 ; D7.2 v1@1753.65,2322.81 ; v1(1773.57,1815.73) U4.18 ; v1@1779.27,115.87 U1.11@1779.27,156.42 ; U1.11 1806.14,181.46 U1.13 1813.86,181.46 U1.1@1837.19,158.13 ; U1.1@1835.73,156.42 U1.1 ; v1@1840.73,115.87 U1.1@1840.73,156.42 ; v1(1840.73,1981.43) 1840.79,1981.43 U4.12 ; U4.8 v1(1919.47,1981.43) ; v1(2188.29,1680) D5.2 ; v1(2188.29,1780) D6.2
  Top Layer w15: v1(268.03,2280) R10.1 ; U7.1 v1(300.39,1115) ; v1(300.39,1685) U7.40 ; v1(336.26,2280) Q3.2 ; C34.1 v1(514.18,968.89) ; C12.1 v1(915.41,540) ; v1(960,225.51) v1(995.26,225.51) U2.4 ; v1(980,365.24) 980,407.7 C10.2 ; SW2.1 v1(1219.49,2005.95) ; v1(1200,640) 1200,639.27 C5.2 v1(1324.04,639.26) 1371.41,639.26 1371.41,630 1438.21,630 ; U9.4 v1(1324.04,912.15) 1324.25,912.36 1324.25,949.12 v1(1324.46,949.33) ; SW1.1 1452.38,2005.95 C33.2 ; v1(1438.21,700) 1438.21,630 ; v1(1440,912.15) C39.2 ; v1(1440,985.29) 1440,983.66 D4.1 ; C7.1 1438.21,630 ; v1(1600.74,940) C40.1 ; v1(1624.44,2322.39) v1@1624.44,2322.8 ; C2.1 1642.76,160.69 C3.1 v1(1642.76,334.52) ; C16.1 v1(1660.1,1470.03) ; v1(1672.27,940) C41.1 ; v1(1706.5,1943.74) C18.2 C20.1 1706.97,1865 v1(1706.97,1829.57) ; C42.1 C44.2 v1(1751.85,2001.3) ; R2.1 1810,394.9 v1(1810,371.92) ; X1.2 v1(1841.89,2261.37) ; C13.1 1855.47,1644.42 v1(1855.76,1644.42) ; C24.1 v1(1871.99,740) ; C43.2 v1(2047.5,2060.3) ; X1.4 1967.16,2156.25 v1(1967.16,2155.25) ; v1(1922.2,334.52) 1980.61,334.52 C8.1 ; C23.2 v1(1934.81,740) ; v1(1993.27,1427.79) 1994,1427.79 D1.1 ; v1(2020.27,1131.42) 2021.01,1131.42 C21.2 ; C17.2 2093.5,1790.36 2093.58,1790.36 2093.58,1820.67 C14.1 C15.1 2130.58,1868.88 v1(2130.58,1868.19) ; C22.1 2157.2,932.72 v1(2157.3,932.72) ; C28.2 v1(2232.38,510.99) ; C27.1 v1(2280,335) ; C26.1 v1(2280,435) ; C19.1 v1(2480,1345) ; v1(2656.43,1131.42) 2657.16,1131.42 D2.1
  Top Layer w20: v1(2041.54,480) U6.2
  other v1: 1778.85,115.45 1841.15,115.45 1810,297.12 1847.4,297.12 1884.8,297.12 1922.2,297.12 1810,334.52 1847.4,334.52 1884.8,334.52 1847.4,371.92 1884.8,371.92 1922.2,371.92 1929.33,480 1966.73,480 2004.14,480 303.17,760.96 303.17,798.36 1984.34,968.58 2021.74,968.58 2059.14,968.58 2620.5,968.58 2657.9,968.58 2695.3,968.58 1982.87,1131.42 2057.67,1131.42 2619.03,1131.42 2693.83,1131.42 1957.33,1264.94 1994.73,1264.94 2032.14,1264.94 563.64,1302.88 601.04,1302.88 638.44,1302.88 563.64,1340.29 601.04,1340.29 638.44,1340.29 563.64,1377.69 601.04,1377.69 638.44,1377.69 1955.86,1427.79 2030.67,1427.79 1872.84,1844.24 1910.24,1844.24 1872.84,1881.64 1910.24,1881.64 1422.04,2005.95 1693.52,2180.75 1725.93,2180.75 1693.52,2213.15 1725.93,2213.15 1753.65,2322.4
GPIO_CTRL: J6.2 R11.1 U7.25 | length 1113.6
  Top Layer w10: v1(932.68,1625) v1@932.68,1625.2
  Top Layer w15: v1@932.68,1625.2 U7.25 ; v1(1001,2369) 1050,2369 R11.1
  Top Layer w20: R11.1@1050.39,2371.16 1050.39,2599.61 J6.2
  Bottom Layer w15: v1(932.68,1625) 971.71,1664.03 ccw(c901,1734.74) 1001,1734.74 v1(1001,2369)
HUB_RST: R13.1 U7.26 U10.13 | length 1108.9
  Top Layer w10: R13.1 1630.32,2122.9 cw(c1647.03,2122.9) 1647.03,2139.61 U10.13
  Top Layer w15: U7.26 1455.2,1675.2 ccw(c1455.2,1715) 1495,1715 1495,2044 cw(c1521.09,2044) 1521.09,2070.09 R13.1
IO0: J3.5 SW2.2 U7.27 | length 1202.8
  Top Layer w15: J3.5 498.55,2011.53 cw(c532.02,2011.53) 502.74,2027.74 cw(c532.02,2011.53) 515.82,2040.82 cw(c532.02,2011.53) 532.02,2045 958.94,2045 cw(c958.94,2002.94) 979.87,2039.42 cw(c958.94,2002.94) 995.42,2023.87 cw(c958.94,2002.94) 1001,2002.94 1001,1905.97 ccw(c1032.92,1905.97) 1032.92,1874.05 SW2.2 1160,1778.1 cw(c1126.39,1778.1) 1126.39,1744.49 U7.27
NetC1_1: C1.1 L1.1 U1.3 U1.12
NetC1_2: C1.2 U1.4 | length 162.9
  Top Layer w10: U1.4 1968.61,224.69 cw(c1968.61,212.54) 1980.76,212.54 1980.76,193.01 C1.2
NetC8_2: C8.2 U1.5 | length 100.3
  Top Layer w10: U1.5 1838.91,250.4 C8.2@1936.96,250.4
NetC9_1: C9.1 L2.1 U2.5
NetC9_2: C9.2 U2.6
NetC16_2: C16.2 R5.1 | length 49.9
  Top Layer w15: C16.2 R5.1
NetC17_1: C17.1 U4.1 | length 126.8
  Top Layer w10: U4.1@1978.23,1815.89 1978.23,1777.18 ccw(c1995.41,1777.18) 1995.41,1760 C17.1
NetC18_1: C18.1 U4.5 U4.13 | length 513.8
  Top Layer w10: C18.1 1810,1914.21 U4.13 cw(c1811.26,1915.47) 1810,1915.47 1810,1995.03 cw(c1829.3,1995.03) 1829.3,2014.33 1993.81,2014.33 cw(c1993.81,1993.14) 2015,1993.14 2015,1914.21 cw(c1995.31,1914.21) 1995.31,1894.53 U4.5
NetC20_2: C20.2 U4.15 U4.16 | length 87.5
  Top Layer w10: C20.2 1811.26,1865 ; U4.16 1811.26,1865 ; U4.15 1811.26,1865
NetC25_1: C25.1 U6.1
NetC38_1: C38.1 L3.1 U9.5
NetC38_2: C38.2 U9.6
NetD3_1: D3.1 J4.2 Q3.3 | length 380.1
  Top Layer w30: Q3.3 D3.1 543.98,2360 570.79,2386.81 J4.2
NetF1_1: F1.1 J2.2
NetLED1_1: LED1.1 R8.1
NetLED1_2: LED1.2 U7.8 | length 151.1
  Top Layer w20: U7.8 650.39,947.99 674.47,923.91 LED1.2
NetQ1_1: Q1.1 R4.2 R5.2 | length 130
  Top Layer w15: R5.2 R4.2@1766.6,1428.5 ; R4.2 R4.2@1766.6,1428.5 ; Q1.1@1766.6,1496.39 R4.2@1766.6,1428.5
NetQ1_2: Q1.2 R3.1 U4.19 U4.23 | length 630.8
  Top Layer w8: v1(1919.11,1698.86) v1@1919.53,1698.86 ; v1@1920.53,1698.86 U4.23@1920.53,1786.26
  Top Layer w10: v1(1810,1786.26) U4.19 ; R3.1@1975.77,1536 v1(2034,1536)
  Top Layer w15: R3.1 ccw(c1975.77,1536.96) R3.1@1975.77,1536
  POWER w10: v1(1810,1786.26) 1810,1726.11 ccw(c1836.61,1726.11) 1836.61,1699.5 1919.11,1699.5 v1(1919.11,1698.86)
  Bottom Layer w10: v1(1919.11,1698.86) 1919.11,1560.56 ccw(c1943.31,1560.56) 1943.31,1536.36 2034,1536.36 v1(2034,1536)
NetQ2_1: Q2.1 U6.5 | length 335.3
  Top Layer w15: v1(2041.54,589.17) U6.5 ; Q2.1 cw(c2232.38,589.17) 2232.38,590 v1(2280,590)
  Bottom Layer w15: v1(2041.54,589.17) 2279.17,589.17 ccw(c2279.17,590) v1(2280,590)
NetQ3_1: Q3.1 R9.2 R10.2 | length 64.8
  Top Layer w20: R9.2 271.58,2397.35 336.21,2397.35 Q3.1
NetR1_1: R1.1 R2.2 U1.7
NetR4_1: R4.1 U4.22 | length 571.3
  Top Layer w15: v1(1766.6,1325) R4.1
  Bottom Layer w15: v1(1766.6,1325) 1766.6,1706.6 cw(c1798.93,1706.6) 1798.93,1738.93 v1(1899.81,1738.93)
NetR6_1: R6.1 U4.24 | length 78.3
  Top Layer w10: U4.24 1940.12,1775.51 1946.46,1771.52 cw(c1939.21,1760) 1952.82,1760 R6.1@1952.82,1713.67
NetU10_1: U10.1 X1.3 | length 80.7
  Top Layer w7: U10.1 1829.97,2167.17 X1.3@1841.89,2155.25
NetU10_2: U10.2 X1.1 | length 160.8
  Top Layer w7: U10.2 1883.34,2186.86 1912.76,2216.28 X1.1@1914.72,2216.28
RXD0: J3.4 U7.36 | length 299.4
  Top Layer w15: v1@498.55,1810 v1(500,1810) 500.39,1810 U7.36
  Bottom Layer w15: v1(500,1810) 570,1810 ccw(c570,1840) 600,1840 600,1950.23 ccw(c596.98,1950.23) J3.4
SOL_IN: R9.1 U7.38 | length 721.5
  Top Layer w15: R9.1 234.53,2256 309.65,2180.88 309.65,1915.77 400.39,1825.03 U7.38
TXD0: J3.3 U7.37 | length 428.1
  Top Layer w15: U7.37 450.39,1826.47 cw(c482.68,1826.47) 482.68,1858.76 667.78,1858.76 ccw(c667.78,1886.38) 695.41,1886.38 J3.3
TYPEC_CC1: C14.2 J1.5 U4.2 | length 680.6
  Top Layer w10: U4.2 1994.26,1835.47 cw(c1994.26,1784.93) v1(2030,1820.67) C14.2
  Bottom Layer w10: v1(2030,1820.67) 2537.24,1820.67 J1.5
TYPEC_CC2: C15.2 J1.6 U4.3 | length 752.9
  Top Layer w10: U4.3 1996.87,1855.16 ccw(c1996.87,1902.02) v1(2030,1868.88) C15.2
  Bottom Layer w10: v1(2030,1868.88) 2030,1950 cw(c2056.85,1950) 2056.85,1976.85 J1.6
TYPEC_N: D5.1 J1.3 U10.11 | length 1601.7
  Top Layer w10: v1(1556.16,2126.52) ccw(c1556.16,2130.36) 1560,2130.36 1560,2156 cw(c1590.86,2156) 1590.86,2186.86 U10.11 ; D5.1 v1(2247.09,1716.57) cw(c2253.33,1710.33) 2249.81,1718.42 cw(c2253.33,1710.33) 2253.33,1719.16 2557.42,1719.16 cw(c2557.42,1681.58) J1.3
  Bottom Layer w10: v1(1556.16,2126.52) cw(c1556.16,2122.15) 1560.53,2122.15 1560.53,2085.4 ccw(c1592.83,2085.4) 1592.83,2053.09 1949.91,2053.09 cw(c1949.91,2023.5) 1979.5,2023.5 1979.5,1827.71 1979.5,1760 ccw(c2018.51,1760) 2018.51,1720.99 2242.67,1720.99 cw(c2242.67,1716.57) v1(2247.09,1716.57)
TYPEC_P: D6.1 J1.4 U10.12 | length 1543.8
  Top Layer w10: v1@1577,2130.36 1577,2156 cw(c1588.17,2156) 1588.17,2167.17 U10.12 ; v1(2247.09,1742.41) ccw(c2262.17,1757.49) 2247.62,1741.89 ccw(c2262.17,1757.49) 2262.17,1736.16 2551.16,1736.16 ccw(c2551.16,1780) J1.4 ; v1@2247.09,1744.91 D6.1
  Bottom Layer w10: v1(1581.91,2126.52) ccw(c1581.91,2122.15) 1577.53,2122.15 1577.53,2085.4 ccw(c1592.83,2085.4) 1592.83,2070.09 1949.91,2070.09 cw(c1949.91,2023.5) 1996.5,2023.5 1996.5,1760 ccw(c2018.51,1760) 2018.51,1737.99 2242.67,1737.99 ccw(c2242.67,1742.41) v1(2247.09,1742.41)
USB1_N: U7.13 U10.9 | length 1944.4
  Top Layer w10: U7.13 913.05,1042.85 v1(913.05,980) ; v1@1424,2225.42 v1(1424,2229.79) ; v1@1424.03,2225.42 1424.13,2225.42 1556.16,2224.89 1643.05,2224.89 1644.39,2226.23 U10.9
  Bottom Layer w10: v1(913.05,980) ccw(c908.58,984.47) 914.9,984.47 914.9,989.46 cw(c919.21,989.46) 916.16,992.5 ccw(c913.12,995.54) 917.43,995.54 917.43,1436.08 cw(c1034.14,1436.08) 951.61,1518.61 1046.71,1613.71 ccw(c976,1684.42) 1076,1684.42 1076,2175.53 cw(c1125.89,2175.53) 1125.89,2225.42 1373.21,2225.42 1414.6,2225.42 cw(c1414.66,2208.42) 1414.66,2225.42 ccw(c1414.66,2235.42) 1420.45,2227.27 v1(1424,2229.79)
USB1_P: U7.14 U10.10 | length 1958.7
  Top Layer w10: v1(938.8,980) 938.8,1043.92 U7.14 ; v1(1424,2204.04) 1424,2208.42 ccw(c1424.29,2225.42) 1424.07,2208.42 ccw(c1424.29,2225.42) 1424.46,2208.42 1556.12,2207.89 ; 1556.16,2207.89 1643.05,2207.89 1644.39,2206.54 U10.10
  Bottom Layer w10: v1(938.8,980) cw(c943.27,984.47) 936.95,984.47 936.95,989.46 ccw(c932.64,989.46) 935.69,992.5 cw(c938.73,995.54) 934.43,995.54 934.43,1435.96 cw(c1034.43,1435.96) 963.71,1506.67 1058.82,1601.77 ccw(c976.29,1684.3) 1093,1684.3 1093,2175.53 cw(c1125.89,2175.53) 1125.89,2208.42 1373.21,2208.42 ; v1(1424,2204.04) 1420.45,2206.57 ccw(c1414.66,2198.42) 1414.66,2208.42 ; 1373.21,2208.42 1414.66,2208.42 ; 1373.21,2208.42 1414.66,2208.42
USB2_N: D7.1 J5.2 U10.7 | length 400.6
  Top Layer w10: U10.7 1699.22,2261.37 1697.88,2262.72 1697.88,2355.87 ; D7.1 1697.88,2355.87 ; J5.2 ccw(c1738.43,2559.29) 1697.71,2559.29 1697.71,2425.52 1697.88,2425.36 1697.88,2355.87
USB2_P: D8.1 J5.3 U10.8 | length 401.3
  Top Layer w10: J5.3 cw(c1640,2559.29) 1680.71,2559.29 1680.71,2418.48 1680.88,2418.31 1680.88,2355.88 1680.88,2262.72 1679.53,2261.37 U10.8 ; D8.1 1680.87,2355.87
VBUS: C19.2 D1.2 J1.2 R3.2 R6.2 U4.21 | length 576.7
  Top Layer w8: U4.21@1879.16,1786.26 1879.16,1693.47 ccw(c1896.12,1693.47) 1896.12,1676.5 R6.2 ; R3.2@2228.75,1535 ccw(c2228.75,1536.96) R3.2
  Top Layer w10: R6.2 2088.5,1676.5 cw(c2088.5,1655) 2110,1655 2110,1560 ccw(c2135,1560) 2135,1535 R3.2@2228.75,1535
VCC_9V: C5.1 C6.1 C7.2 C10.1 C13.2 C39.1 L1.2 Q1.3 R1.2 U2.2 U2.3 U4.20 U9.2 U9.3 | length 77.7
  Top Layer w10: C13.2@1860.47,1713.5 U4.20
  Top Layer w15: 1500,400 1500,404.9
VCC_12V: C2.2 C3.2 C4.2 C26.2 C27.2 C28.1 D3.2 J4.1 Q2.3 U1.2 U1.9 U1.10 U6.4 | length 3175.2
  Bottom Layer w50: J4.1 669.21,2530.79 ccw(c740,2530.79) 740,2460 1400,2460 cw(c1400,2360) 1500,2360 1500,1976.27 v1(1500,279.42) v1(1500,247.02) v1(1500,182.24)
  other v1: 1884.8,115.45 1884.8,145.34 1884.8,175.24 1735.2,180.24 2126.96,200.44 2154.36,200.44 1735.2,212.63 1500,214.63 2126.96,237.84 2154.36,237.84 1735.2,245.02 2126.96,275.24 2154.36,275.24 1735.2,277.41
VCC_DCIN: C21.1 C22.2 C23.1 C24.2 C25.2 D2.2 F1.2 Q2.2 U6.3 U6.6 | length 383.7
  Top Layer w15: 1889.49,563.35 1889.49,467.25 ccw(c1916.74,467.25) 1916.74,440 2053.74,440 ccw(c2053.74,465.2) 2078.94,465.2 U6.3
pads on no net: J1.7 J1.8 U1.8 U4.6 U4.7 U4.9 U4.10 U4.11 U7.4 U7.5 U7.6 U7.7 U7.9 U7.10 U7.11 U7.12 U7.15 U7.16 U7.17 U7.18 U7.19 U7.20 U7.21 U7.22 U7.23 U7.24 U7.28 U7.29 U7.30 U7.31 U7.32 U7.33 U7.34 U7.35 U7.39 U10.3 U10.4 U10.5 U10.6 U10.14

## Polygon pours and split planes (outlines as drawn)
GND on Top Layer "NONET_L-01_P-001" (solid, remove dead copper, pour order 10): 0,0 0,648 246.69,648 246.69,2151.61 0,2151.61 0,2755.91 2755.91,2755.91 2755.91,0
VCC_12V on Top Layer "NONET_L-01_P-001" (solid, pour order 5): 635.75,2633.46 635.75,2342.28 767.64,2342.28 767.64,2633.46
VCC_9V on Top Layer "NONET_L-01_P-001" (solid, remove dead copper, pour order 4): 1819.69,1722.5 1350.4,1722.5 1350.4,1178.5 1724.64,1178.5 1724.64,440 1832.5,440 1832.5,1357.64 1618,1357.64 1618,1557.48 1819.69,1557.48
NetC1_1 on Top Layer "NONET_L-01_P-001" (solid, pour order 2): 1447.99,144.76 1447.99,124.2 1750.37,124.2 1750.37,89.71 1807.09,89.71 1807.09,144.76 1813.86,144.76 1813.86,89.71 1910,89.71 1910,209.92 1952.61,209.92 1952.61,20 1322.01,20 1322.01,144.76
VCC_DCIN on Top Layer "NONET_L-01_P-001" (solid, pour order 1): 1854.49,585 1975.75,585 1975.75,612.56 2016.34,612.56 2016.34,720 2300,720 2300,800 1970,800 1970,665.36 1854.49,665.36
VCC_9V on Top Layer "NONET_L-01_P-001" (solid, pour order 0): 1018.19,300.31 1018.19,569.27 1724.64,569.27 1724.64,365.24 1079.21,365.24 1079.21,300.31
3V3 on POWER "NONET_L-01_P-001" (solid, pour order 7): 0,0 0,648 246.69,648 246.69,2151.61 0,2151.61 0,2755.91 2755.91,2755.91 2755.91,0
5V0 on POWER "NONET_L-01_P-001" (solid, pour order 6): 1560,2082.59 1620.63,2082.59 1620.63,1920 1560,1920 1560,1040 1920,1040 1920,2680 1560,2680
VCC_12V on POWER "NONET_L-01_P-001" (solid, pour order 3): 1471.31,315 2225,315 2225,0 1471.31,0
GND on GROUND "NONET_L-01_P-001" (solid, pour order 8): 0,0 0,648 246.69,648 246.69,2151.61 0,2151.61 0,2755.91 2755.91,2755.91 2755.91,0
GND on Bottom Layer "NONET_L-01_P-001" (solid, remove dead copper, pour order 9): 0,0 0,648 246.69,648 246.69,2151.61 0,2151.61 0,2755.91 2755.91,2755.91 2755.91,0

## Other copper
Top Layer:
  rectangle net NetC1_1: 1721,63 1936.96,89.71
  rectangle net NetC1_1: 1910,63 1943.61,209.92
  rectangle net NetC1_1: 1803.11,63 1816.89,150.87
  rectangle net VCC_DCIN: 1854.49,545.35 1975.75,612.56
  rectangle net VCC_9V: 1517.94,1557.48 1819.69,1722.5
  rectangle net GND: 281.53,745.15 321.53,1085.04
  rectangle net 3V3: 332.68,745.15 371.53,1085.04
  rectangle net 3V3: 1739.35,2061.1 1863.31,2079.1
  rectangle net VCC_9V: 1583.24,508.35 1789.33,884.21
  rectangle net VCC_9V: 1649.5,1704.5 1867.97,1722.5
  rectangle net NetR4_1: 1893.94,1738.93 1905.75,1802.01
  rectangle net VBUS: 2119.98,1275 2365,1445
  region net GND: 1854.57,1821.69 1795.51,1821.69 1795.51,1809.88 1854.57,1809.88
  region net GND: 1854.57,1900.43 1795.51,1900.43 1795.51,1888.62 1854.57,1888.62
  region net GND: 1854.57,1841.38 1795.51,1841.38 1795.51,1829.57 1854.57,1829.57
  region net GND: 1846.69,1900.43 1846.69,1959.49 1834.88,1959.49 1834.88,1900.43
  region net GND: 1925.43,1900.43 1925.43,1959.49 1913.62,1959.49 1913.62,1900.43
  rectangle net GND: 1925.43,1868.94 1984.49,1880.75
  rectangle net NetC20_2: 1795.51,1849.25 1827.01,1880.75
  rectangle net NetQ1_2: 1824.81,1470.03 2006.3,1523.41
  rectangle net VBUS: 2199.21,1275 2365,1616.61
  rectangle net VBUS: 2199.21,1470.03 2515,1615
  rectangle net VBUS: 2199.21,1549.69 2595,1616.61
  rectangle net VCC_12V: 1667.26,143.19 1750.37,185.31
  rectangle net VCC_12V: 1870,100 1898.59,190.24
  rectangle net VCC_12V: 1844.45,180.39 1895,190.24
  rectangle net NetC1_1: 1803.11,85 1816.89,150.87
  rectangle net VCC_12V: 1667.13,185.31 1750.37,297.12
  rectangle net VCC_12V: 1679.26,180.39 1784.26,209.92
  rectangle net VCC_12V: 1667.26,143.19 1709.26,297.12
  rectangle net NetC1_1: 1844.45,200.08 1952.61,209.92
  rectangle net GND: 1801.14,205 1818.86,371.92
  rectangle net NetR1_1: 1766.9,252 1785.35,349.9
  rectangle net NetR1_1: 1719.64,319.9 1789.33,349.9
  rectangle net VCC_12V: 2108.89,180.51 2172.18,660.59
  rectangle net NetC25_1: 1922.31,508.35 2016.34,533.43
  rectangle net VCC_DCIN: 2004.14,612.56 2016.34,707.68
  rectangle net VCC_12V: 2066.73,610.43 2170.92,660.59
  rectangle net VCC_DCIN: 1854.49,612.56 2016.34,665.36
  rectangle net 5V0: 1350.4,1030.29 1689.77,1138.58
  rectangle net NetC38_1: 1170,823.19 1290.73,1138.58
  rectangle net VCC_9V: 1570,389.9 1724.64,884.21
  rectangle net VCC_9V: 1398.84,823.19 1672.27,884.21
  region net NetC38_1: 1248.11,846.81 1248.11,823.19 1343.72,823.19 1343.72,846.81
  region net NetC38_2: 1248.11,809.41 1248.11,785.79 1343.72,785.79 1343.72,809.41
  rectangle net VCC_DCIN: 2213.44,636.57 2523.3,1100.59
  rectangle net NetF1_1: 2566.54,575.75 2735,931.89
  rectangle net 3V3: 779.57,253.84 925.24,360
  rectangle net 3V3: 779.57,253.84 880.41,496.74
  rectangle net NetC9_1: 779.57,135.73 1079.21,179.04
  rectangle net NetC9_2: 1092.99,149.59 1116.61,245.2
  rectangle net NetC9_1: 1055.59,149.59 1079.21,245.2
  rectangle net NetLED1_1: 542.18,901.88 615.42,926.88
  rectangle net NetQ3_1: 255.53,2341.85 280.53,2409.8

## Silkscreen, mask and mechanical layers (free items; w line width, h text height)
Top Overlay:
  lines w5: 1640,2506.87 1640,2487.56 1738.43,2487.56 1738.43,2507.48
  lines w7: 277.53,797.19 397.01,797.19 397.01,981.4 ; 1615.26,319.9 1615.26,196.99 1707.14,196.99
  lines w10: 412.88,605 523.18,605 523.18,770
  text "SOLENOID" at 470,2410 h60
  text "GPIO" at 950,2410 h60
  text "GND   D+   D-   5V" at 1445.12,2410 h60
  text "POGO" at 2500.51,2295.71 h60
  text "SPR" at 2338.2,2144.41 h60
  text "3V3" at 429.42,2112.95 h60 r90
  text "GND" at 527.84,2112.95 h60 r90
  text "TXD" at 626.27,2112.95 h60 r90
  text "RXD" at 724.69,2112.95 h60 r90
  text "IO0" at 823.12,2112.95 h60 r90
  text "ENA" at 921.54,2112.95 h60 r90
  text "SPR" at 2338.2,2045.99 h60
  text "CC2" at 2338.2,1947.56 h60
  text "BOOT" at 1089.29,1856.07 h60 r90
  text "ENAB" at 1289.29,1856.07 h60 r90
  text "CC1" at 2338.2,1849.14 h60
  text "D+" at 2338.2,1750.71 h60
  text "D-" at 2338.2,1652.29 h60
  text "VBUS" at 2298.24,1553.86 h60
  text "GND" at 2327.65,1455.44 h60
  text "STATUS" at 728.83,884.57 h60
  text "12V" at 2317.65,579.93 h60
  text "GND" at 2317.65,481.5 h60
  text "DC IN" at 2500.03,330.71 h60
Board Outline:
  the board outline again, w10